# EAGLE board realys_board_2 (EAGLE 5.04)
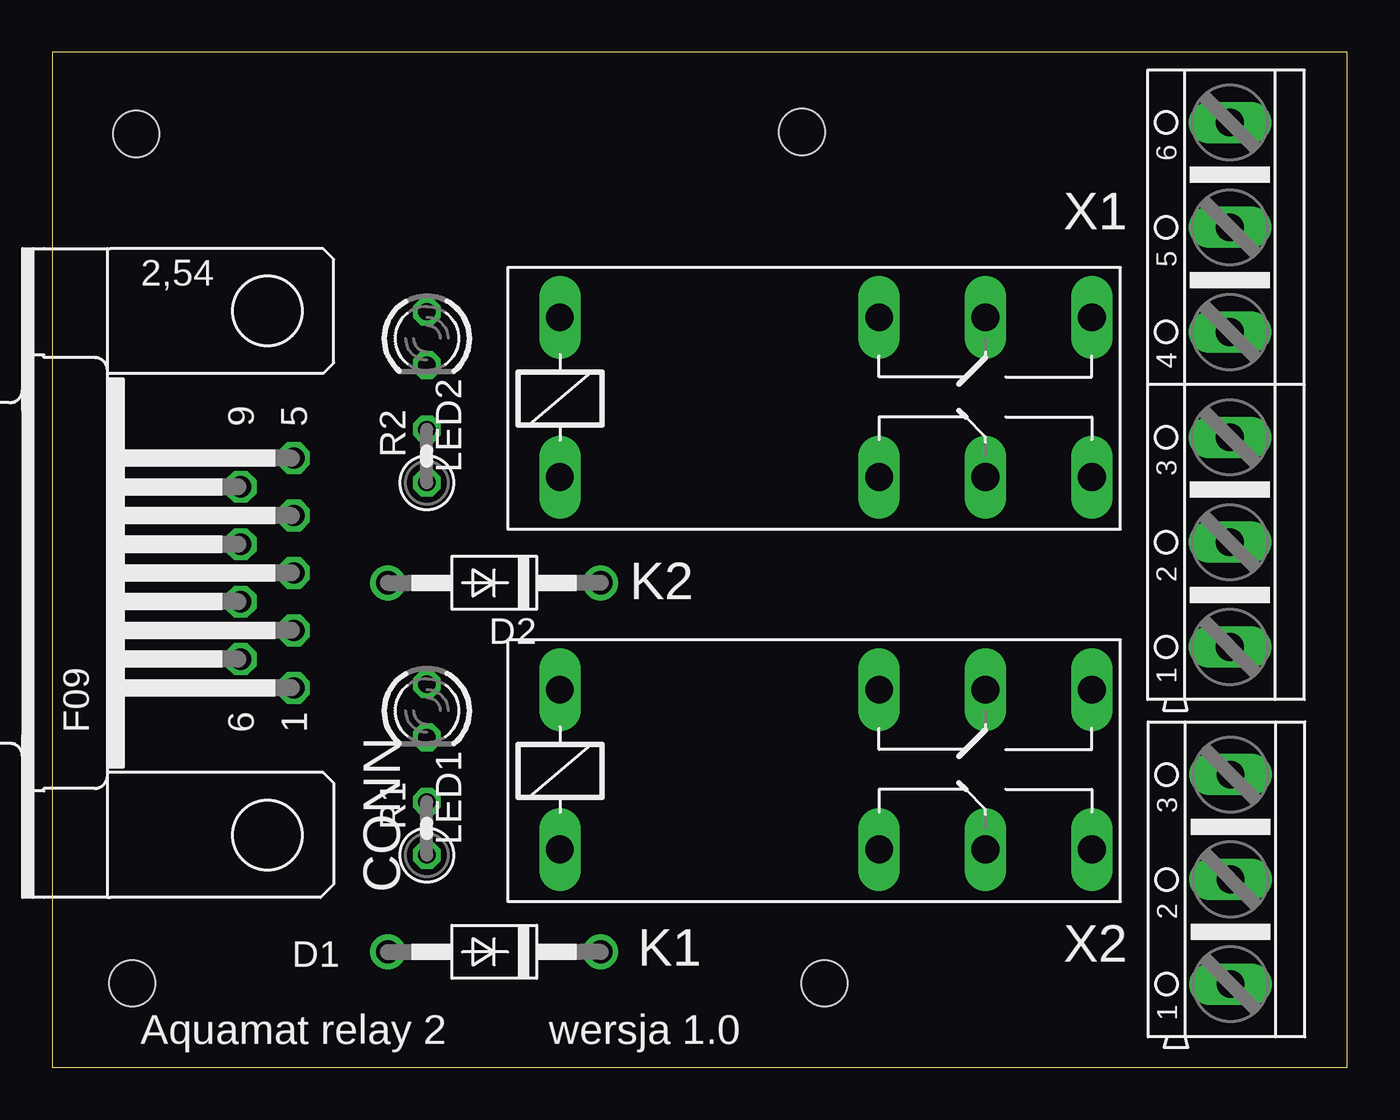
[diagram p0: board, top side]
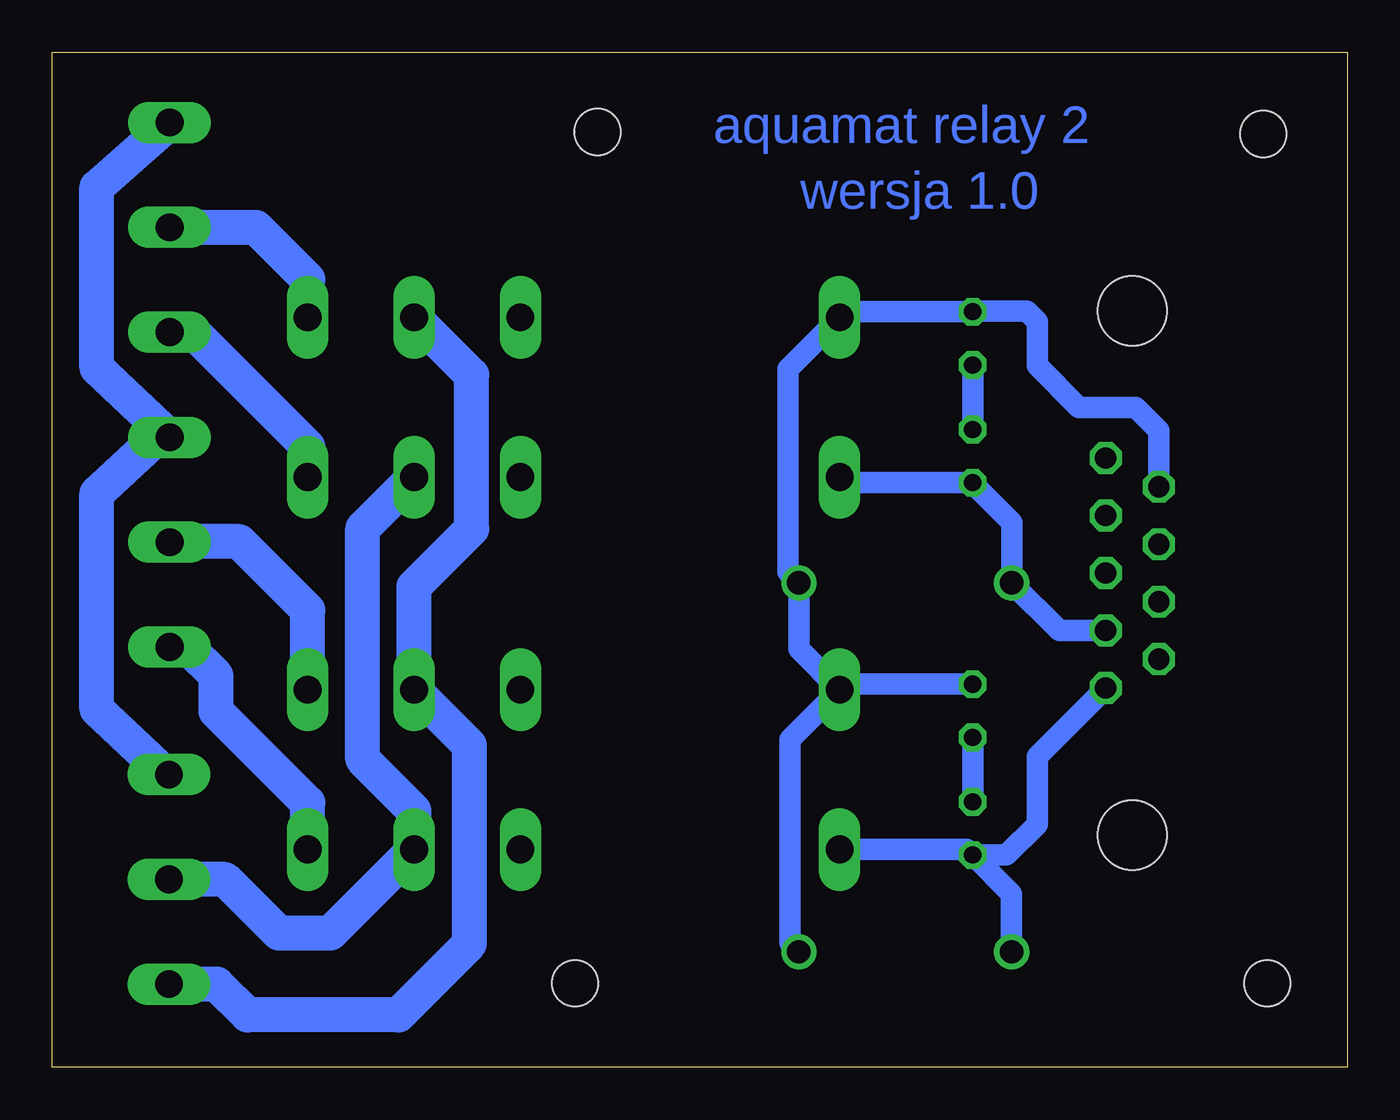
[diagram p1: board, bottom side, seen from below]

Size 61.82 x 48.46 mm. Coordinates in mm from the lower left corner, seen from the top.
Outline: 0,0 61.82,0 61.82,48.46 0,48.46 0,0
Copper layers (1*16): Top 0.035mm / dielectric 1.5mm / Bottom 0.035mm
Design rules "default": minimum track width 10mil, minimum drill 24mil, track to track 8mil, track to pad 8mil, pad to pad 8mil, via to via 8mil, smd to smd 8mil, copper to edge 40mil, drill to drill 8mil, minimum pad ring 10mil, minimum via ring 8mil, stop-mask expansion 4mil, vias tented up to drill 0mil, thermal gap 10mil
Holes 2.2 mm at 4.01,44.56 35.79,44.66 3.81,4.01 36.86,4.01

## Footprints (pad centres in the part's own frame; a part is rotated, then mirrored left to right if it is on the bottom)
F09H = drill 1.016 octagon: 1 -5.486,-1.27; 2 -2.743,-1.27; 3 0,-1.27; 4 2.743,-1.27; 5 5.486,-1.27; 6 -4.115,1.27; 7 -1.372,1.27; 8 1.372,1.27; 9 4.115,1.27 | hole 3.302: -12.522,0; 12.522,0
DO41-10 = drill 1.118 round: A 5.08,0; C -5.08,0
F4052 = drill 1.321 long: 1 -3.81,3.81; 2 -3.81,-3.81; O1 11.43,-3.81; O2 11.43,3.81; P1 16.51,-3.81; P2 16.51,3.81; S1 21.59,-3.81; S2 21.59,3.81
LED3MM = drill 0.813 octagon: A -1.27,0; K 1.27,0
0207/2V = drill 0.813 octagon: 1 -1.27,0; 2 1.27,0
AK500/6 = drill 1.321 long: 1 -12.522,0; 2 -7.518,0; 3 -2.515,0; 4 2.515,0; 5 7.518,0; 6 12.522,0
AK500/3 = drill 1.321 long: 1 -5.004,0; 2 0,0; 3 5.004,0

## Placement (x,y rotation side)
CONN  DB9  [F09H]  10.26,23.6 90 top
D1  1N4004  [DO41-10]  21.1,5.51 180 top
D2  1N4004  [DO41-10]  21.1,23.13 180 top
K1  12V / 220V  [F4052]  28.04,14.21 0 top
K2  12V / 220V  [F4052]  28.04,31.99 0 top
LED1  3mm  [LED3MM]  17.88,17.02 270 top
LED2  3mm  [LED3MM]  17.88,34.8 270 top
R1  1k  [0207/2V]  17.88,11.4 90 top
R2  1k  [0207/2V]  17.88,29.18 90 top
X1  220V_OUT  [AK500/6]  56.22,32.59 90 top
X2  220V_IN  [AK500/3]  56.25,8.97 90 top

## Library data of the parts
CONN = con-subd
D1 D2 = diode
K1 K2 = relay
LED1 LED2 = led
R1 R2 = rcl
X1 X2 = con-ptr500

## Nets
N$1: K1.P1 K2.P1 X2.2
N$2: K1.P2 K2.P2 X2.1
N$3: LED1.K R1.2
N$4: LED2.K R2.2
N$5: K1.S1 X1.1
N$6: X1.3 X1.6 X2.3
N$7: K1.S2 X1.2
N$10: CONN.9 D1.C D2.C K1.1 K2.1 LED1.A LED2.A
N$11: CONN.1 D1.A K1.2 R1.1
N$12: CONN.2 D2.A K2.2 R2.1
N$13: K2.S1 X1.4
N$14: K2.S2 X1.5

## Tracks (layer width: path | path; a pad name or v marks a point on that pad's centre or on a via)
N$1
  Bottom 1.676: X2.2 53.57,8.97 51,6.4 48.55,6.4 K1.P1 44.55,12.25 47,14.7 47,25.73 K2.P1
N$2
  Bottom 1.676: X2.1 53.97,3.97 52.5,2.5 45.3,2.5 41.9,5.9 41.9,15.37 K1.P2 44.55,22.95 41.8,25.7 41.8,33.05 K2.P2
N$3
  Bottom 1.016: R1.2 LED1.K
N$4
  Bottom 1.016: R2.2 LED2.K
N$5
  Bottom 1.676: K1.S1 49.63,12.63 54,17 54,18.7 55.3,20 56.15,20 X1.1
N$6
  Bottom 1.676: X2.3 56.37,13.97 59.7,17.1 59.7,27.4 56.8,30.1 56.24,30.1 X1.3 56.22,30.12 59.7,33.4 59.7,42.03 X1.6
N$7
  Bottom 1.676: K1.S2 49.63,21.83 52.9,25.1 56.19,25.1 X1.2
N$10
  Bottom 1.016: K1.1 23.96,18.29 LED1.A | K1.1 26.18,19.97 D2.C 26.7,23.65 26.7,33.33 K2.1 23.96,36.07 LED2.A 17.85,36.1 15.3,36.1 14.8,35.6 14.8,33.5 12.8,31.5 10.1,31.5 8.99,30.39 CONN.9 | K1.1 26.6,15.65 26.6,5.93 D1.C
N$11
  Bottom 1.016: R1.1 18.15,10.4 K1.2 | R1.1 16.02,8.27 D1.A | R1.1 16.27,10.13 14.8,11.6 14.8,14.84 CONN.1
N$12
  Bottom 1.016: K2.2 23.96,27.91 R2.1 17.88,27.88 16,26 16,23.15 D2.A 13.75,20.86 CONN.2
N$13
  Bottom 1.676: K2.S1 49.63,29.63 55,35 56.12,35 X1.4
N$14
  Bottom 1.676: K2.S2 49.63,37.63 52.1,40.1 X1.5

## Text on the board
Bottom: aquamat relay 2 | wersja 1.0
tPlace: Aquamat relay 2 | wersja 1.0